# Altium PCB panel.PcbDoc (part 2 of 3)
Units mm, origin at the board's own origin, x right, y up, seen from the top; angles counter-clockwise.
Board outline 152.4 x 101.6 mm, 2 copper layers (Top Layer, Bottom Layer); 276 components, 0 nets, 996 pads, 236 vias.
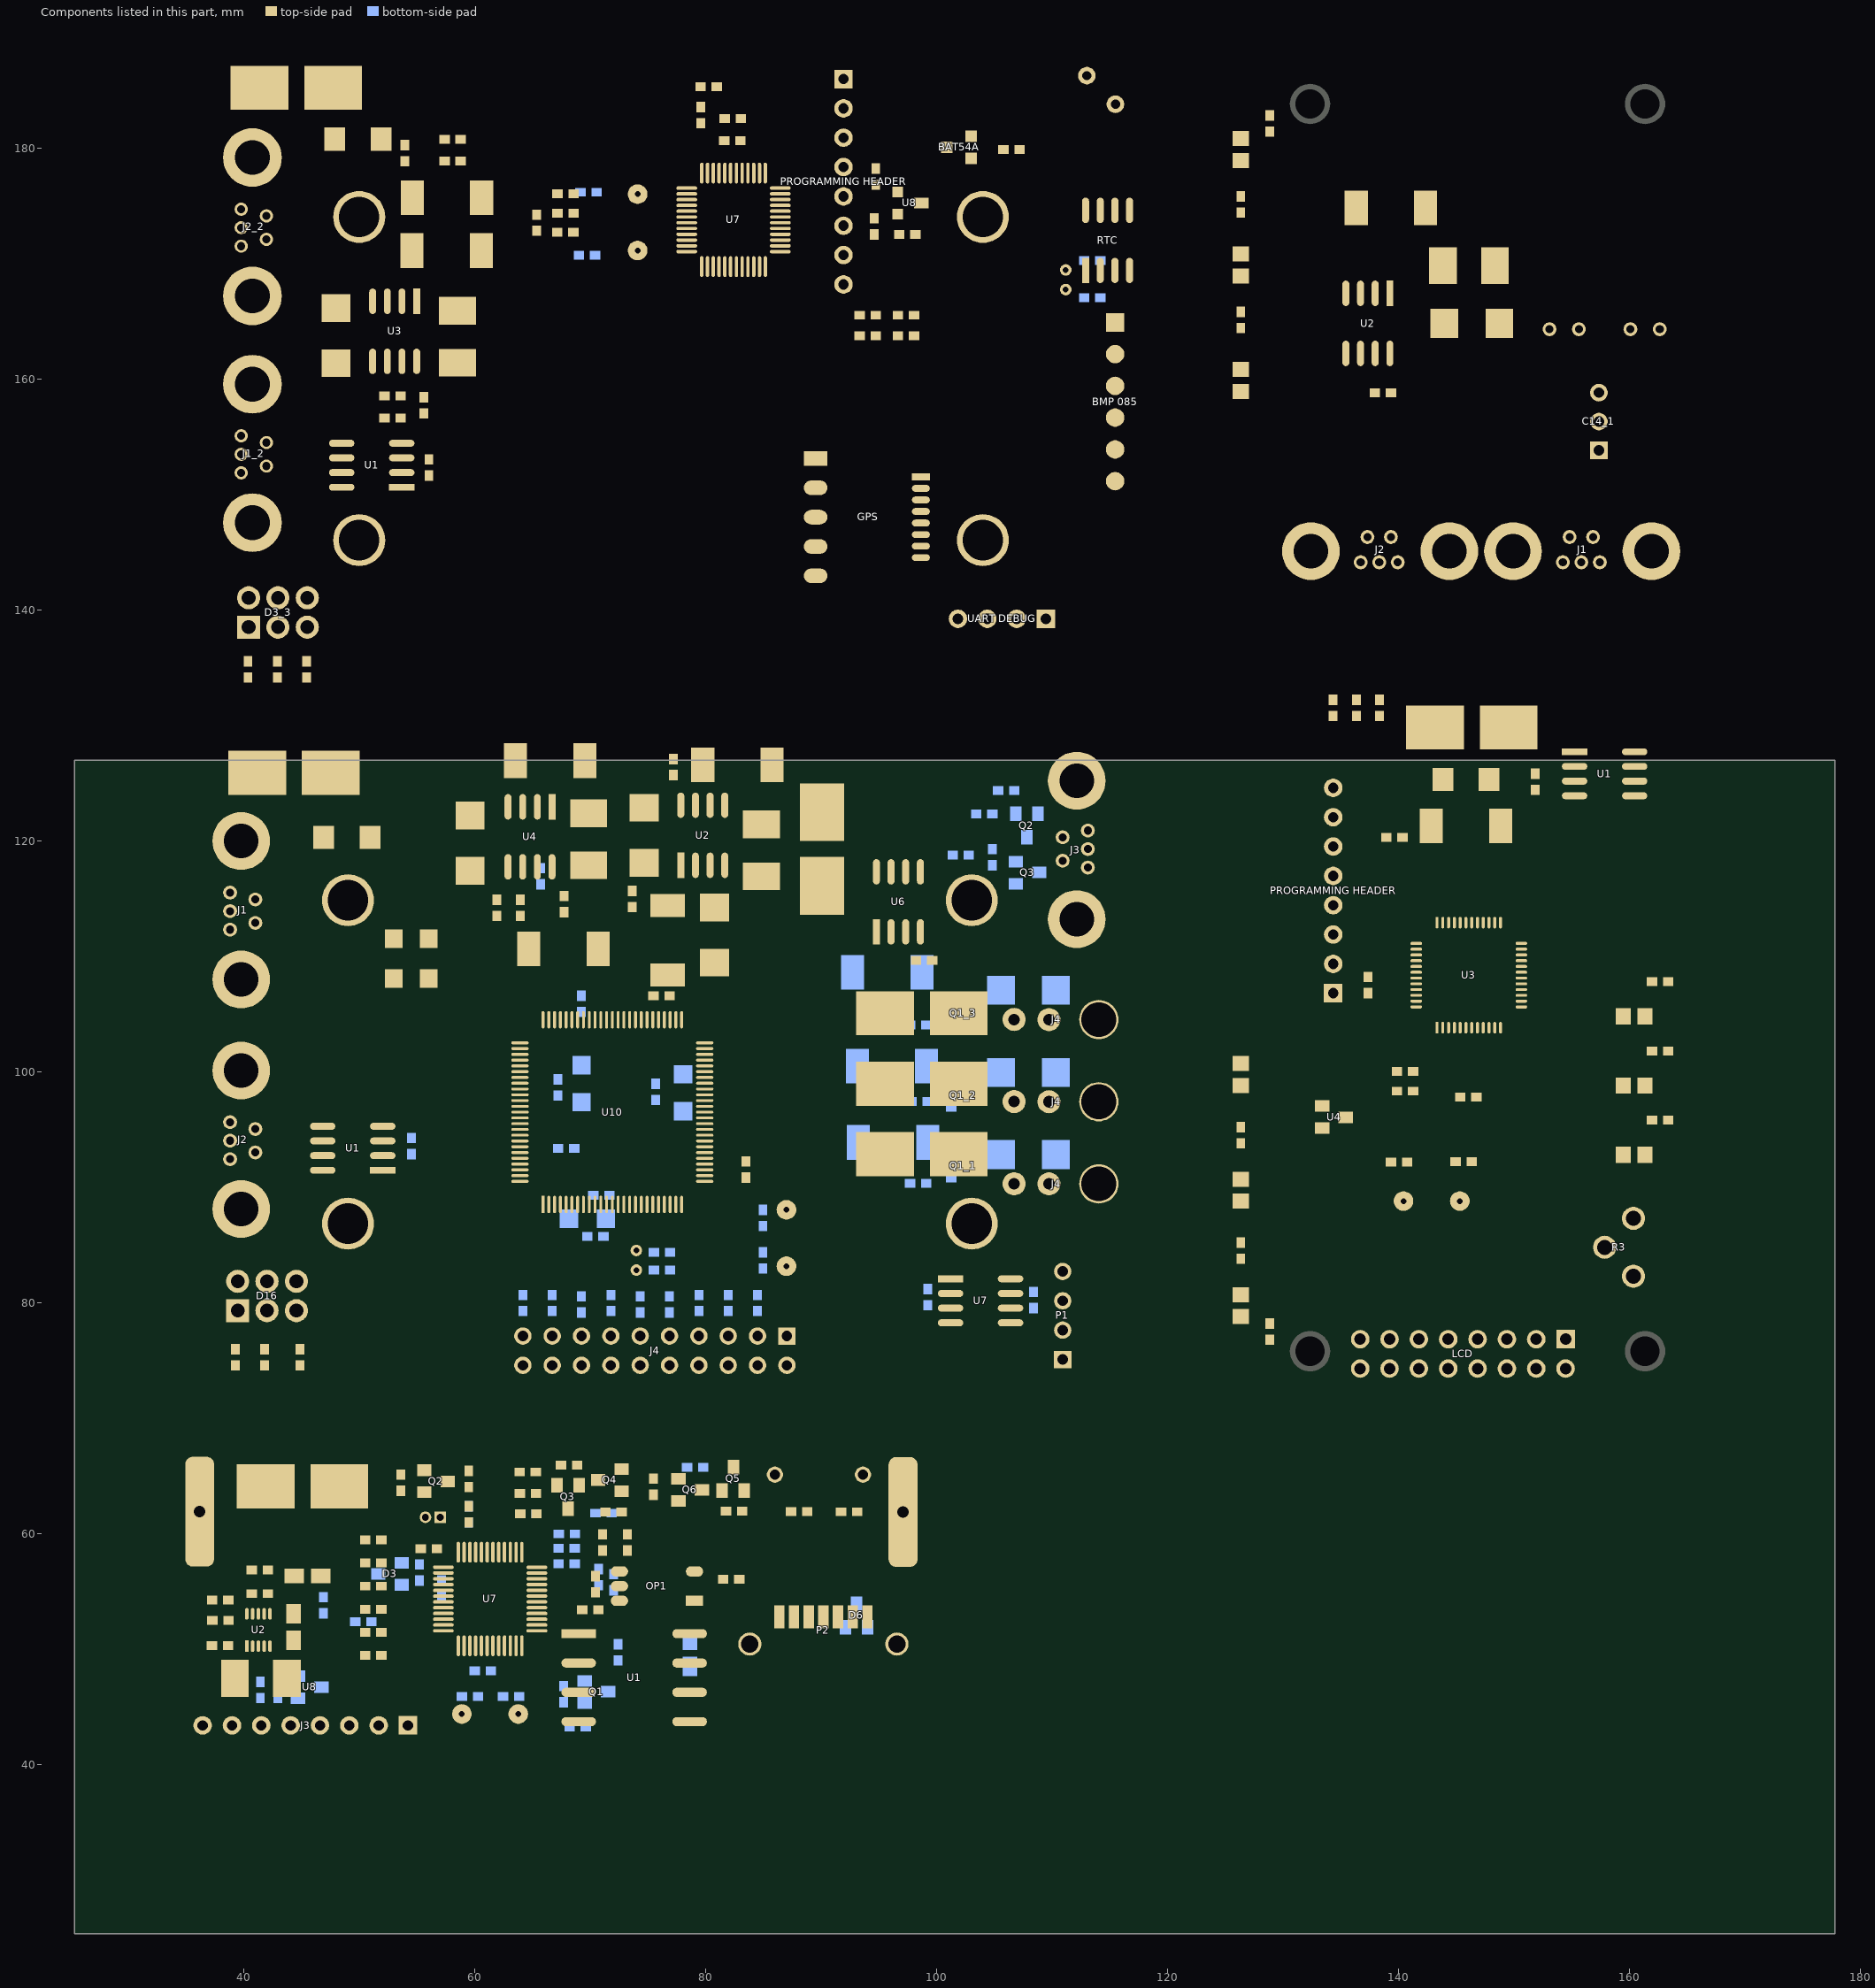
[diagram p2: the components of this part, seen from the top]

## Via types
v1: diameter 0.8, hole 0.4, Top Layer to Bottom Layer, 133 vias
v2: diameter 0.4, hole 0.2, Top Layer to Bottom Layer, tented both sides, 32 vias
v3: diameter 0.8, hole 0.4, Top Layer to Bottom Layer, tented both sides, 30 vias
v4: diameter 0.6, hole 0.3, Top Layer to Bottom Layer, tented both sides, 15 vias
v5: diameter 1.27, hole 1, Top Layer to Bottom Layer, 6 vias
v6: diameter 0.4, hole 0.2, Top Layer to Bottom Layer, 4 vias
v7: diameter 2, hole 1, Top Layer to Bottom Layer, 4 vias
v8: diameter 1, hole 0.4, Top Layer to Bottom Layer, 3 vias
v9: diameter 0.8, hole 0.4, Top Layer to Bottom Layer, tented top, 2 vias
v10: diameter 1.27, hole 0.711, Top Layer to Bottom Layer, 2 vias
v11: diameter 1, hole 0.6, Top Layer to Bottom Layer, tented both sides, 2 vias
v12: diameter 0.6, hole 0.3, Top Layer to Bottom Layer, 2 vias
v13: diameter 0.8, hole 0.4, Top Layer to Bottom Layer, tented bottom, 1 vias

## Nets (pads, with @x,y where several pads share a name; then routed paths per layer and width w, separated by ;. In a path a pad name is that pad's centre, name@x,y a point inside that pad or via, vN(x,y) a via of type N, cw(c..) or ccw(c..) an arc to the next point about the centre after c; other vN are vias at no path point) (continued)
copper on no net: | length 5575.7
  Top Layer w0.2: 111.198,167.756 113.898,167.756 114.184,168.042 114.184,169.415 ; 111.198,169.456 112.873,169.456 ; 126.352,80.728 126.502,80.578 127.352,80.578 ; 126.352,90.728 127.352,89.728 ; 126.352,100.728 127.352,99.728 127.352,89.728 ; 126.352,158.928 128.052,157.228 128.052,133.378 v1(134.177,127.253) ; 126.352,168.928 127.352,167.928 ; 126.352,178.928 127.352,177.928 127.352,167.928 ; 127.352,157.928 127.352,167.928 ; v1(133.352,85.578) 128.352,80.578 127.352,80.578 ; 133.402,97.053 134.727,98.378 135.227,98.378 ; 134.352,109.368 134.352,109.828 134.665,110.141 141.542,110.141 ; 134.352,111.908 134.352,112.328 136.852,114.828 145.852,114.828 146.842,113.838 146.842,112.941 ; 134.352,114.448 135.222,115.318 146.362,115.318 147.342,114.338 147.342,112.941 ; 134.352,119.528 133.612,118.788 133.606,118.788 132.552,117.734 132.552,117.728 132.377,117.553 132.377,101.228 135.227,98.378 ; v1(136.352,112.328) 136.352,111.828 137.552,110.628 141.529,110.628 141.542,110.641 ; 136.736,144.144 135.852,145.027 135.852,146.328 137.852,148.328 154.352,148.328 155.852,146.828 155.852,145.76 154.236,144.144 154.236,133.288 158.802,128.721 158.802,126.928 159.267,126.463 160.452,126.463 ; 137.32,146.328 138.901,147.909 153.239,147.909 154.82,146.328 154.82,146.001 153.336,144.516 153.336,133.622 158.402,128.556 158.402,125.828 159.037,125.193 160.452,125.193 ; 137.352,106.828 139.352,106.828 140.165,107.641 141.542,107.641 ; 137.352,108.225 137.352,108.828 137.665,109.141 141.542,109.141 ; v1(137.852,104.828) 140.352,102.328 142.883,102.328 143.772,103.216 143.772,103.771 143.842,103.841 ; v1(137.852,116.328) 138.352,115.828 146.852,115.828 148.342,114.338 148.342,112.941 ; v1(138.352,111.328) 138.352,112.828 139.852,114.328 142.852,114.328 143.342,113.838 143.342,112.941 ; v1(138.665,108.141) 141.542,108.141 ; 139.352,92.203 139.352,90.603 140.437,89.518 140.437,88.828 139.937,88.328 ; v1(139.852,111.328) 140.039,111.141 141.542,111.141 ; v1(141.352,103.328) 141.865,103.841 143.342,103.841 143.365,103.841 ; 144.342,103.841 144.342,102.818 139.902,98.378 135.227,98.378 ; 144.842,103.841 144.842,104.319 147.442,106.919 147.442,110.418 150.102,113.078 v1(152.102,113.078) ; 145.342,103.841 145.342,102.818 144.352,101.828 144.352,98.828 145.352,97.828 ; v1(145.352,100.828) 145.842,101.318 145.842,103.841 ; 145.817,88.328 145.317,88.828 145.317,89.618 146.352,90.653 146.352,92.228 ; 146.342,103.841 146.342,99.838 v1(146.352,99.828) ; 146.749,97.828 147.352,98.431 147.352,101.828 146.842,102.338 146.842,103.841 ; 147.342,103.841 147.342,102.404 147.752,101.994 147.752,94.928 v1(148.352,94.328) ; 147.842,103.841 147.842,109.818 149.852,111.828 v1(152.102,111.828) ; 148.342,103.841 148.342,97.838 v1(148.852,97.328) ; v1(149.852,99.328) 149.352,99.828 149.352,104.762 148.852,105.262 148.852,108.828 149.665,109.641 150.642,109.641 ; v1(150.352,100.828) 150.852,100.828 153.352,103.328 153.352,107.828 152.852,108.328 151.852,108.328 151.665,108.141 150.642,108.141 ; 150.642,105.641 151.852,104.43 v1(151.852,103.328) ; 150.642,107.641 152.289,107.641 v1(152.352,107.578) ; 150.642,108.641 151.48,108.641 155.252,112.412 155.252,123.923 ; 150.642,109.141 151.415,109.141 153.352,111.078 153.352,123.672 154.203,124.523 156.231,124.523 156.652,124.944 156.652,127.528 156.447,127.733 155.252,127.733 ; v1(157.102,98.828) 159.452,98.828 ; v1(157.102,104.828) 159.452,104.828 ; 127.352,80.578 127.352,89.728
  Top Layer w0.25: 42.937,134.169 43.95,133.156 47.834,133.156 75.848,161.17 v1(75.848,167.306) v1@75.998,167.456 ; 45.477,134.169 48.211,134.169 75.098,161.056 75.098,165.956 v1(74.498,166.556) ; 53.711,150.641 60.883,150.641 v1(74.198,163.956) ; v1@76.538,171.496 v1(76.498,171.456) 76.585,171.543 78.384,171.543 ; v1(78.198,170.156) 78.335,170.293 78.335,171.021 ; 80.66,168.794 80.273,168.407 80.273,166.044 81.611,164.707 91.798,164.707 92.745,163.76 93.356,163.76 ; 81.184,169.743 81.184,168.682 80.723,168.221 80.723,166.231 81.797,165.157 92.975,165.157 93.356,165.538 ; v1(81.798,167.756) 81.798,168.156 82.184,168.542 82.184,169.743 ; v1(83.098,165.956) 83.173,166.031 83.173,169.732 83.184,169.743 ; 83.684,169.743 83.684,166.97 v1(84.598,166.056) ; v1(84.798,163.751) 91.8,163.751 95.882,159.669 v5@115.476,159.669 ; v1(86.298,162.456) 86.298,160.356 89.989,156.665 v5(115.476,156.665)
  Top Layer w0.254: 37.292,54.271 37.312,54.251 37.312,52.511 ; 38.689,54.271 40.151,54.271 40.719,54.839 ; 38.709,52.511 39.158,52.96 40.171,52.96 40.298,53.087 ; 38.812,50.287 40.298,50.287 ; 38.848,92.459 38.988,92.459 39.875,91.572 43.2,91.572 44.396,92.768 46.864,92.768 ; 39.266,47.499 39.43,47.499 ; 39.304,74.607 40.751,73.16 46.726,73.16 49.115,75.549 49.115,79.537 62.564,92.986 63.898,92.986 63.944,93.032 ; 39.304,76.004 39.304,79.142 39.507,79.345 ; 40.536,57.151 40.536,55.119 40.798,54.857 40.798,53.087 ; 40.798,50.287 v2(40.798,51.567) ; 41.032,112.918 41.381,112.918 ; 41.298,53.087 41.298,52.145 v2(41.312,52.131) ; 41.547,43.382 42.625,42.304 56.025,42.304 56.852,43.131 56.852,45.691 59.609,48.448 59.609,50.323 ; 41.844,74.607 42.789,73.662 46.257,73.662 48.459,75.864 48.459,79.523 62.468,93.532 63.944,93.532 ; 41.844,76.004 41.844,79.142 42.047,79.345 ; 41.933,57.151 42.882,57.151 43.087,56.946 v2(43.087,56.931) ; 42.2,55.119 41.933,55.119 42.775,55.119 42.937,55.281 v2(42.937,55.606) ; 43.501,94.038 46.864,94.038 ; 43.832,50.287 44.346,50.801 ; v2(44.115,54.334) 44.346,54.103 44.37,53.111 ; 44.346,53.087 44.37,53.111 ; 44.371,53.088 44.37,53.111 ; 44.587,79.345 44.892,79.04 44.892,76.004 ; 44.59,53.331 44.37,53.111 ; 44.892,74.607 45.623,74.607 46.04,75.024 v9(46.078,75.024) ; v1(45.203,120.278) v1@45.252,120.327 ; 46.285,120.998 46.956,120.327 ; 49.707,43.622 49.782,43.622 ; v2(50.092,47.511) v2@50.132,47.511 ; 51.601,43.622 49.332,45.891 49.332,54.071 49.752,54.491 53.049,54.491 54.681,56.123 57.309,56.123 ; 51.952,49.491 53.639,47.804 57.515,47.804 59.109,49.398 59.109,50.323 ; 51.952,51.491 52.972,51.491 54.452,50.011 v2(57.712,50.011) ; 51.952,53.491 52.099,53.344 54.539,53.344 v2(54.552,53.331) ; 51.952,55.491 53.407,55.491 54.539,56.623 57.309,56.623 ; 51.952,57.491 52.072,57.611 57.612,57.611 v2(57.832,57.831) ; 51.952,59.491 v2(53.852,59.491) ; 52.064,91.498 55.99,91.498 60.206,95.714 60.206,98.127 62.611,100.532 63.944,100.532 ; 52.064,92.768 v3(53.689,92.768) ; 52.064,95.308 56.382,95.308 62.285,101.211 62.285,102.744 62.71,103.169 64.912,103.169 65.219,102.862 65.219,100.213 65.024,100.018 63.958,100.018 63.944,100.032 ; 53.012,112.112 53.012,111.533 53.012,112.262 ; v2@53.173,53.973 54.838,55.638 57.294,55.638 57.309,55.623 ; v2(53.192,52.631) 54.932,52.631 55.432,53.131 57.301,53.131 57.309,53.123 ; 53.633,63.746 53.76,63.619 55.665,63.619 v2(56.443,62.841) ; v6(55.092,51.711) 55.092,52.051 55.664,52.623 57.309,52.623 ; 55.352,58.711 55.352,58.736 52.549,61.539 52.549,64.467 53.225,65.143 53.633,65.143 55.284,65.143 55.665,65.524 ; v6(55.812,51.711) 55.812,51.991 55.944,52.123 57.309,52.123 ; 56.06,111.533 56.514,111.533 v1(57.429,110.618) ; 56.749,58.711 58.321,58.711 58.609,58.423 58.598,58.411 ; 57.032,61.451 57.989,62.408 59.512,62.408 59.512,64.074 ; 57.697,64.559 58.609,65.471 59.512,65.471 ; v2(58.572,61.011) 59.512,61.011 60.109,60.414 60.109,58.423 ; v2(58.609,56.291) 58.792,56.291 59.609,57.108 59.609,58.423 ; 58.916,44.415 61.119,46.618 61.119,50.313 61.109,50.323 ; v2(59.592,52.411) 59.982,52.801 59.982,55.243 62.109,57.37 62.109,58.423 ; v4(60.452,48.931) 60.492,48.931 60.609,49.048 60.609,50.323 ; 60.609,58.423 60.609,60.488 61.872,61.751 63.972,61.751 v2(63.972,60.811) ; v2(60.652,53.131) 60.652,55.271 62.586,57.205 62.586,58.4 62.609,58.423 ; v1(61.168,97.007) 61.168,96.044 63.18,94.032 63.944,94.032 ; v2(61.312,54.751) 62.772,54.751 63.582,55.561 63.582,57.471 63.586,57.475 63.586,58.4 63.609,58.423 ; 61.609,50.323 61.609,46.602 63.796,44.415 ; 61.929,113.527 63.961,113.527 65.45,113.527 ; 61.929,114.924 63.961,114.924 63.961,115.015 64.181,115.235 64.181,117.768 ; 62.109,50.323 62.132,50.3 62.132,49.375 62.132,48.551 v4(62.352,48.331) ; v1(62.282,90.567) 62.282,91.312 62.954,91.984 63.896,91.984 63.944,92.032 ; v1(62.359,98.292) 63.099,99.032 63.944,99.032 ; 62.577,117.434 62.911,117.768 ; 62.911,122.89 62.982,122.961 ; 62.911,126.318 63.556,126.963 63.391,127.128 ; v2(63.535,51.646) 65.386,51.646 65.409,51.623 ; 63.813,63.642 63.94,63.515 ; 63.915,65.371 63.94,65.346 63.94,63.515 ; 63.944,90.532 63.944,85.44 70.411,78.973 70.411,76.64 71.276,75.775 72.984,75.775 74.356,77.147 ; 63.944,92.532 64.995,92.532 v1(65.625,93.162) 67.578,93.162 70.687,90.054 ; 63.944,94.532 65.907,94.532 66.297,94.142 68.157,94.142 69.431,95.416 v1(69.431,95.466) ; 63.944,95.032 67.425,95.032 v1(67.497,95.104) ; 63.956,98.52 v1(65.625,98.52) ; v2(63.992,52.291) 64.16,52.123 65.409,52.123 65.386,52.146 ; v2(64.109,56.431) 64.109,54.345 64.332,54.123 65.409,54.123 ; v1(64.842,82.923) 69.276,78.489 69.276,77.147 ; 65.245,117.562 65.451,117.768 ; 65.337,63.515 66.657,62.195 68.096,62.195 ; 65.369,61.751 63.94,63.18 63.94,63.515 ; 65.409,52.623 65.428,52.604 ; 65.409,54.623 66.56,54.623 66.751,54.432 66.751,49.272 67.152,48.871 68.992,48.871 69.032,48.831 ; 65.409,55.123 66.78,55.123 67.205,54.698 67.205,50.058 67.552,49.711 70.472,49.711 70.892,49.291 70.892,46.451 70.692,46.251 69.072,46.251 69.032,46.291 ; 65.409,55.623 65.432,55.6 67.083,55.6 v2(67.112,55.571) ; 65.409,56.123 67.024,56.123 67.972,57.071 67.972,59.218 69.805,61.051 74.512,61.051 75.492,62.031 75.492,63.391 ; 65.409,56.623 66.524,56.623 67.518,57.617 67.518,59.477 69.932,61.891 71.352,61.891 ; 65.498,113.85 67.752,113.85 ; v2(65.792,47.411) v2(65.792,51.011) ; 65.944,88.532 65.944,84.448 71.816,78.576 71.816,77.147 ; v1(66.052,106.318) 66.547,106.318 67.444,105.421 67.444,104.532 ; 66.49,88.486 66.444,88.532 66.444,84.595 70.978,80.061 79.062,80.061 81.976,77.147 ; 66.721,117.768 66.721,116.278 67.752,115.247 ; 66.944,88.532 66.944,84.787 71.216,80.515 80.306,80.515 83.278,77.543 83.278,76.376 82.677,75.775 80.808,75.775 79.436,77.147 ; 67.156,64.227 67.156,64.687 67.156,65.635 67.492,65.971 ; v1(67.271,92.089) 67.271,92.221 69.944,89.548 69.944,88.532 ; 67.444,88.532 67.444,84.93 71.257,81.117 80.546,81.117 84.516,77.147 ; 67.929,104.547 v1(67.929,106.983) ; 67.992,88.484 67.944,88.532 67.944,85.726 69.38,84.29 v13(69.444,84.29) ; v4(68.652,56.091) 68.912,56.351 69.892,57.331 71.986,57.331 72.556,56.761 72.556,57.587 v4(72.552,57.591) ; 68.889,65.971 69.061,65.799 69.061,64.227 70.255,64.227 70.712,64.684 ; 69.328,122.968 69.896,122.4 ; 69.335,53.451 69.335,53.797 70.492,54.954 ; v1(69.423,86.754) v1@69.465,86.796 ; 69.556,122.74 69.896,122.4 ; v4(69.712,55.491) 69.955,55.491 70.492,54.954 ; v1(69.896,120.64) 69.896,122.4 ; 70.409,90.323 70.409,88.567 70.444,88.532 70.43,88.518 ; 70.492,56.351 71.352,55.491 72.556,55.491 ; 70.704,110.675 71.988,110.675 v1(71.991,110.672) ; v1(70.813,106.396) v1@70.864,106.447 ; v12(71.021,90.389) 70.687,90.054 ; 71.042,122.4 69.896,122.4 ; v1(71.229,91.664) 72.861,91.664 73.944,90.581 73.944,88.532 ; 71.444,88.532 71.444,89.296 70.687,90.054 ; v1(71.662,86.242) 72.944,87.524 72.944,88.532 72.944,90.086 72.641,90.389 v12(72.227,90.389) ; 71.944,104.532 71.944,96.105 78.763,89.286 87.731,89.286 97.457,79.56 101.22,79.56 ; v4(72.052,62.731) 72.032,62.711 72.032,62.608 72.749,61.891 72.749,63.714 72.744,63.719 ; v1(72.106,115.052) 72.877,114.281 73.678,114.281 ; v4(72.272,60.091) 73.109,60.091 73.232,59.968 ; 72.444,104.532 72.444,96.513 79.206,89.751 88.478,89.751 97.355,80.874 101.176,80.874 101.22,80.83 ; 72.556,54.221 71.682,54.221 71.189,54.714 70.732,54.714 70.492,54.954 ; 73.444,88.532 73.444,85.767 73.194,85.517 73.194,83.68 74.021,82.853 ; 73.678,115.678 73.678,117.588 74.694,118.604 ; 74.021,84.553 75.059,84.553 75.451,84.945 75.451,85.677 74.444,86.684 74.444,88.532 ; v1(74.228,106.447) 74.64,106.447 74.869,106.218 75.106,106.218 75.499,106.611 75.499,105.987 75.944,105.542 75.944,104.532 ; 75.492,64.788 77.648,64.788 77.66,64.776 77.66,65.303 77.252,65.711 v4(77.252,66.291) ; v1(75.545,102.737) 76.444,103.636 76.444,104.532 76.444,105.454 76.928,105.938 76.928,106.579 76.896,106.611 ; 76.444,88.532 76.444,86.539 77.251,85.732 84.479,85.732 87.017,83.194 ; 76.726,108.408 78.779,108.408 v1(78.886,108.301) ; 76.726,114.408 77.091,114.408 ; 76.896,77.147 76.896,77.632 ; 76.944,88.532 76.944,86.681 77.439,86.186 85.129,86.186 87.017,88.074 ; 77.208,125.685 77.208,123.765 77.869,123.104 ; 77.234,127.108 79.266,127.108 79.774,126.6 ; v3(79.032,55.811) v3@79.056,55.835 ; v1(79.117,109.534) 79.168,109.483 80.79,109.483 ; 79.139,122.128 79.139,123.104 ; 79.692,63.811 81.415,63.811 81.455,63.771 81.455,62.323 82.039,61.739 ; 79.835,126.6 79.774,126.6 ; 79.944,93.532 79.992,93.58 90.234,93.58 v1(90.264,93.55) ; 79.944,94.532 88.078,94.532 90.364,96.818 v1(90.414,96.818) ; 79.944,95.032 83.72,95.032 90.616,101.928 90.616,101.976 v1(90.565,102.027) ; 79.944,98.032 81.282,98.032 81.849,97.465 v1(81.856,97.465) ; 79.944,100.532 85.058,100.532 95.446,110.92 95.446,113.443 95.847,113.844 98.317,113.844 98.613,113.548 98.613,112.139 ; 79.944,101.032 84.802,101.032 94.803,111.033 94.803,112.139 ; v1(79.981,119.744) 80.409,119.316 80.409,117.904 ; 80.409,125.965 79.774,126.6 ; 80.666,127.431 81.101,127.431 v1(81.132,127.4) ; v1(81.605,92.217) v1@81.724,92.336 ; 81.679,117.904 81.679,118.273 ; 81.679,123.104 81.734,123.104 v1(82.749,124.119) ; 82.93,56.074 82.947,56.091 82.972,56.116 ; 83.36,63.771 83.42,63.711 ; 83.436,61.739 83.436,63.695 ; 83.982,116.076 84.854,116.948 ; 84.854,121.448 85.774,122.368 ; 89.056,121.448 90.104,122.496 ; 93.638,65.143 93.792,64.989 ; 94.022,52.831 94.032,52.841 ; 96.073,112.139 96.073,110.31 96.131,110.252 v1(96.207,110.252) ; v1(96.624,120.829) 96.861,121.066 101.168,121.066 v1(102.461,122.359) v1@102.208,122.359 ; 99.629,109.659 100.802,109.659 v1(100.806,109.663) ; 100.888,78.05 101.128,78.29 101.22,78.29 ; 106.42,78.29 107.757,78.29 110.932,75.115 ; 106.42,79.56 109.027,79.56 110.932,77.655 ; 106.42,80.83 110.297,80.83 110.932,80.195 ; 106.42,82.1 109.051,82.1 109.686,82.735 110.932,82.735 ; 110.651,120.327 110.932,120.327 ; 112.694,121.334 113.116,120.911
  Top Layer w0.3: 37.272,50.331 37.272,51.331 v2(37.292,51.351) ; 38.848,92.459 40.382,93.993 41.609,93.993 42.745,95.129 42.745,109.381 39.792,112.334 38.848,112.334 ; 39.43,47.499 41.298,49.367 41.298,50.287 ; 39.814,171.515 40.939,171.515 44.198,168.256 44.198,158.009 40.898,154.709 40.898,152.974 39.814,151.89 40.847,150.856 43.398,150.856 44.453,151.911 48.511,151.911 ; 41.032,93.043 42.506,93.043 43.501,94.038 43.501,110.798 41.381,112.918 ; 41.798,50.287 41.798,49.467 43.766,47.499 ; 41.798,53.087 41.798,53.644 42.121,53.967 42.668,53.967 42.934,54.233 ; 41.998,152.474 44.969,155.445 ; 41.998,172.099 44.969,169.128 44.969,155.445 ; 42.993,135.622 42.993,138.526 ; 44.346,53.087 44.371,53.087 44.408,53.087 ; 45.477,135.566 45.477,138.47 45.533,138.526 ; v4(46.092,55.331) 46.688,55.927 46.688,56.363 ; v2(47.912,46.811) 48.532,47.431 v3(48.532,54.511) ; 48.511,153.181 47.233,153.181 44.969,155.445 ; v2(49.312,59.491) 50.555,59.491 50.555,57.491 50.555,55.491 ; v2@50.132,47.511 54.021,43.622 54.787,43.622 ; v2(50.552,48.351) 50.555,48.354 50.555,49.491 50.555,51.491 50.555,53.491 ; 53.012,112.262 56.133,115.383 ; 53.711,151.911 55.81,151.911 56.064,151.657 ; 53.711,154.451 62.993,154.451 v9(71.598,163.056) ; v3(54.104,103.904) 54.104,107.012 53.012,108.104 56.06,108.104 ; v3(54.739,54.511) 54.852,54.511 55.74,53.623 57.309,53.623 ; v4(55.812,55.011) 55.812,55.095 55.84,55.123 57.309,55.123 ; 58.812,180.778 58.812,178.873 63.215,178.873 71.798,187.456 v1(87.998,187.456) ; 61.109,58.423 61.109,59.568 61.532,59.991 v4(65.632,59.991) ; 62.109,50.323 62.109,51.668 v3@62.132,51.691 ; 64.109,58.423 64.624,58.423 65.112,58.911 v4(65.632,58.911) ; v2(65.292,66.071) 65.312,66.051 65.312,65.371 ; 65.525,174.114 65.398,174.241 ; v4(66.452,65.391) 67.156,64.687 ; 68.595,176.056 68.573,176.034 68.573,172.717 73.837,172.717 74.048,172.506 76.148,172.506 76.685,173.043 78.384,173.043 ; v1(69.423,86.754) 69.959,86.754 70.43,87.225 70.43,88.518 ; v4(69.752,60.111) 70.969,60.111 71.112,59.968 ; 70.944,88.532 70.944,86.96 v1(71.662,86.242) ; 72.744,65.624 73.705,65.624 v2(73.712,65.631) ; 74.13,176.02 76.107,174.043 78.384,174.043 ; v1(75.298,173.256) 75.585,173.543 78.384,173.543 ; v1(76.698,175.356) 76.885,175.543 78.384,175.543 ; v2(77.66,61.951) 77.66,62.871 ; v1(78.018,98.532) 79.944,98.532 83.941,98.532 94.542,109.133 96.284,109.133 97.343,110.192 ; 78.384,174.543 v1@80.77,174.543 ; 78.384,176.543 77.211,176.543 75.198,178.556 66.898,178.556 63.998,175.656 63.998,171.37 66.112,169.256 76.656,169.256 77.798,168.114 77.798,166.956 v1(87.998,156.756) ; 78.632,46.291 80.572,46.291 81.352,47.071 81.352,50.231 83.192,52.071 84.492,52.071 85.672,50.891 87.677,50.891 88.942,52.156 88.942,52.831 ; 78.632,48.831 80.452,48.831 80.692,49.071 80.692,50.451 82.892,52.651 84.619,52.651 85.789,51.481 86.997,51.481 87.672,52.156 87.672,52.831 ; 78.848,91.532 79.944,91.532 79.969,91.507 80.766,91.507 81.381,90.892 ; 79.706,182.038 79.591,182.153 80.295,182.153 80.661,182.519 81.635,182.519 ; 79.944,93.032 81.605,93.032 ; 80.184,177.843 80.184,178.87 79.883,179.171 66.664,179.171 63.398,175.905 63.398,171.263 66.005,168.656 76.407,168.656 77.198,167.865 77.198,161.256 86.144,152.31 88.072,152.31 88.706,151.676 90.387,151.676 91.298,150.765 91.298,149.802 89.547,148.051 ; 80.684,177.843 80.684,179.219 80.132,179.771 66.416,179.771 62.798,176.153 62.798,171.156 65.898,168.056 76.159,168.056 76.598,167.617 76.598,161.149 85.937,151.81 87.724,151.81 88.457,151.076 89.062,151.076 89.547,150.591 88.172,149.216 88.172,147.482 88.798,146.856 90.698,146.856 92.383,148.541 98.657,148.541 99.696,148.541 100.098,148.14 100.098,145.156 104.405,140.849 104.405,139.249 ; v1@80.988,184.056 80.988,185.328 ; v1(81.605,92.217) 81.605,93.032 ; 81.672,182.556 81.635,182.519 ; 81.684,177.843 81.684,180.602 81.635,180.651 81.635,182.519 ; v1(81.898,166.456) 82.684,167.242 82.684,169.743 ; 83.032,180.651 v3@84.293,180.651 ; 83.069,182.556 v3(84.498,182.556) ; v1@83.184,175.942 83.184,177.843 ; 83.5,92.26 82.728,93.032 81.605,93.032 ; 84.184,177.843 84.184,178.827 88.802,183.445 91.959,183.445 ; 85.897,64.916 85.897,63.195 87.167,61.925 ; 86.484,172.543 88.753,172.543 89.448,173.238 89.448,175.854 91.959,178.365 ; 86.484,173.043 88.546,173.043 88.948,173.445 88.948,177.894 91.959,180.905 ; 86.484,173.543 87.585,173.543 v6(87.998,173.956) ; v1(87.672,150.456) 86.948,149.732 86.948,145.201 87.793,144.356 95.172,144.356 96.357,145.541 98.657,145.541 ; 89.067,61.925 91.739,61.925 ; v3(90.398,172.356) 91.03,172.356 91.959,173.285 92.594,173.92 94.626,173.92 94.398,174.148 94.398,176.841 96.023,176.841 96.658,176.206 ; 91.372,150.691 95.863,150.691 96.998,149.556 98.657,149.556 ; 91.508,168.656 91.959,168.205 ; 93.136,61.925 93.792,62.581 93.792,64.989 ; v3(94.626,170.872) 94.626,172.523 ; 94.753,163.76 96.658,163.76 v1(96.658,162.196) 105.258,162.196 v1(105.298,162.156) ; 94.753,165.538 96.658,165.538 96.658,166.796 v1(96.598,166.856) ; v1(95.398,175.356) 96.453,174.301 96.658,174.301 ; 96.073,117.339 96.073,118.814 97.817,120.558 109.031,120.558 110.242,121.769 112.259,121.769 113.116,120.911 ; v3(96.785,170.943) 96.785,172.523 96.785,174.174 ; v1(96.898,160.956) 103.698,160.956 v1(103.798,161.056) ; 97.343,112.139 97.343,110.192 ; 97.343,117.847 97.343,118.923 98.259,119.839 110.163,119.839 110.651,120.327 ; 98.232,109.659 97.876,109.659 97.343,110.192 ; 103.008,179.132 103.008,181.032 ; 103.108,180.056 105.635,180.056 105.802,179.889 ; 107.199,179.889 111.587,179.889 115.5,183.802 117.698,181.604 117.698,173.544 115.454,171.3 115.454,169.415 ; v3@113.898,154.056 114.039,153.915 v5(115.476,153.915) ; 113.998,151.256 114.089,151.165 v5(115.476,151.165) ; v1@115.398,176.456 115.442,176.5 v1(115.454,176.5) 115.454,174.615 ; 116.724,174.615 v1@116.724,176.43 ; 65.398,174.241 65.513,174.356 67.198,174.356 67.198,176.056 65.798,176.056 v1(65.398,175.656) 65.398,174.241
  Top Layer w0.4: 39.507,81.885 42.047,81.885 44.587,81.885 48.994,81.885 52.368,85.259 52.368,88.567 49.824,91.111 49.824,95.787 61.39,107.353 67.559,107.353 v1(67.929,106.983) ; 42.392,50.287 v4(42.99,50.287) 43.832,50.287 ; 42.512,53.087 44.346,53.087 ; 42.934,54.233 42.952,54.233 44.371,55.652 44.371,56.332 44.402,56.363 44.402,57.401 ; 48.309,62.508 48.309,64.127 ; 49.848,94.038 52.064,94.038 53.65,94.038 v1(53.654,94.034) ; 69.032,43.751 71.132,43.751 v3(71.252,43.871) ; 69.032,51.371 72.192,51.371 v3@73.912,53.091 ; 70.732,53.451 70.812,53.371 71.552,53.371 71.832,53.091 v3@73.912,53.091 ; 71.112,58.571 73.232,58.571 73.332,58.571 73.952,57.951 v3(73.952,53.131) v3@73.912,53.091 ; v1(75.545,102.737) 75.545,101.005 v1(78.018,98.532) 78.018,92.362 78.848,91.532 ; v3(78.632,42.891) 78.632,43.751 ; 79.68,54.221 79.056,54.221 79.392,54.221 81.245,56.074 81.533,56.074 ; 81.381,90.892 92.428,90.892 97.093,86.227 ; 82.947,56.091 v3(91.572,56.091) 92.752,54.911 92.752,52.831 ; v3(86.352,54.571) 86.352,52.881 86.402,52.831 ; 90.212,52.831 v3(90.212,54.691) ; 94.022,52.831 v3(95.172,52.831) ; v1(96.165,85.299) 97.093,86.227 ; v1(100.888,77.133) 100.888,78.05 ; 101.22,82.1 97.093,86.227
  Top Layer w0.5: v1(38.498,133.956) 40.184,133.956 40.397,134.169 ; 39.692,153.456 39.814,153.334 39.814,153.49 ; 40.453,135.622 40.453,138.526 ; 44.402,56.363 44.402,58.221 48.309,62.128 48.309,64.127 ; 44.408,53.087 45.832,54.511 v3(48.532,54.511) ; v1@45.252,120.327 46.956,120.327 ; v1@47.998,164.256 48.017,164.275 48.017,166.145 ; 51.192,166.741 51.192,168.15 v3(51.698,168.656) ; 53.998,180.282 53.986,180.27 55.19,180.27 v1(55.698,180.778) 57.415,180.778 ; 55.002,161.541 55.002,160.191 55.637,159.556 55.637,158.426 ; 56.064,151.657 56.065,151.656 v3(57.598,151.656) ; v3(58.912,54.911) 58.912,52.172 59.393,51.691 v3(62.109,51.691) ; 59.624,117.434 62.577,117.434 ; 59.624,122.204 59.723,122.303 v1(59.723,124.043) ; 60.563,175.756 60.621,175.698 60.84,175.698 ; v1(61.867,127.128) 63.391,127.128 ; 62.911,117.768 62.911,119.156 63.529,119.774 68.022,119.774 69.896,117.9 ; 62.911,122.968 62.911,126.318 ; 66.721,122.968 69.328,122.968 ; 69.556,122.74 69.556,126.963 ; v1@70.864,106.447 v1(74.228,106.447) ; 74.694,118.604 77.169,118.604 77.869,117.904 ; 74.694,122.404 75.789,121.309 78.32,121.309 79.139,122.128 ; 77.091,114.408 79.139,116.456 79.139,117.904 ; 78.632,51.371 78.632,52.551 v3(78.652,52.571) ; 78.634,121.623 79.704,121.623 81.679,119.648 81.679,117.904 ; v3@79.056,55.835 79.056,56.761 ; 79.835,126.6 80.666,127.431 ; 80.409,117.904 80.409,116.076 ; 80.409,123.104 80.409,125.965 ; v1@80.77,174.543 v1(80.792,174.521) ; 80.79,114.253 80.79,115.695 80.409,116.076 ; 81.679,118.273 84.854,121.448 89.056,121.448 ; v1(83.098,175.856) v1@83.184,175.942 ; 83.982,116.076 80.409,116.076 ; 85.774,122.368 85.774,126.6 ; v1(87.698,142.956) 89.532,142.956 89.547,142.971 ; v1(87.698,145.511) 89.547,145.511 ; 90.104,116.126 95.796,121.818 100.307,121.818 v1(100.669,122.18) ; v3(91.432,54.631) 91.432,52.881 91.482,52.831 ; 98.657,149.541 99.613,149.541 100.698,148.456 100.698,145.505 106.945,139.258 106.945,139.249 ; 98.657,150.541 99.983,150.541 100.269,150.256 v1(101.798,150.256) ; 116.724,169.415 116.724,168.53 v1(117.598,167.656) ; 126.352,78.828 126.955,78.225 128.852,78.225 ; 126.352,83.828 125.202,83.828 ; 126.352,85.225 126.352,88.828 ; 126.352,93.828 126.352,92.714 125.202,91.564 125.202,83.828 ; 126.352,95.225 126.352,98.828 ; 126.352,160.828 126.352,164.431 ; 126.352,165.828 125.202,166.978 125.202,175.828 ; 126.352,170.828 126.352,174.431 ; 126.352,175.828 125.202,175.828 ; 126.352,180.828 126.955,181.431 128.852,181.431 ; v1(129.352,161.328) 130.852,162.828 130.852,181.328 ; v10(130.852,100.578) 130.852,94.328 134.602,90.578 ; v1(130.852,134.328) 130.852,132.203 140.352,122.703 140.352,120.328 ; v1(132.852,136.828) 134.352,135.328 134.352,132.225 136.352,132.225 ; 133.402,95.148 133.402,94.353 134.152,93.603 v1(135.277,93.603) v1@135.282,93.598 ; v10(133.752,102.728) 133.827,102.728 137.352,106.253 137.352,106.828 134.352,106.828 ; 134.352,124.608 138.632,120.328 138.955,120.328 138.955,119.635 140.352,118.238 ; v1(134.352,156.828) 136.717,159.193 136.717,162.228 ; 135.434,96.088 140.102,96.088 ; v1@135.447,159.328 135.447,162.228 ; 136.352,174.828 135.447,173.923 135.447,167.428 135.447,165.733 143.062,165.733 143.967,164.828 143.967,151.943 v1(143.852,151.828) ; 137.352,108.225 137.245,108.118 133.834,108.118 133.102,108.85 133.102,117.506 133.834,118.238 140.352,118.238 ; 138.352,132.225 v1(138.352,134.328) ; 139.257,162.228 139.257,158.828 139.352,158.828 ; 139.257,167.428 141.452,167.428 143.852,169.828 143.852,173.328 142.352,174.828 135.852,181.328 130.852,181.328 ; v1(139.852,101.528) 139.852,100.081 139.88,100.053 ; 140.749,92.203 141.427,92.203 142.702,93.478 ; 141.274,97.228 141.274,98.353 ; v1(143.352,117.828) 142.942,118.238 140.352,118.238 ; 144.955,92.228 143.952,92.228 142.702,93.478 ; 145.352,97.828 144.427,98.753 142.777,98.753 134.602,90.578 ; v1(145.352,117.828) 148.852,121.328 147.852,122.328 147.852,125.328 148.352,125.828 151.852,125.828 152.487,126.463 155.252,126.463 ; v1(145.852,162.328) 148.352,164.828 148.737,164.828 148.352,165.213 148.352,169.828 ; 146.749,97.828 146.749,96.45 144.952,94.653 v1(142.702,94.653) 142.702,93.478 ; v1(151.852,115.828) 151.852,124.431 152.955,124.431 153.717,125.193 155.252,125.193 ; 151.932,76.868 151.932,78.908 157.852,84.828 ; v1(157.002,92.828) 159.452,92.828 ; v1(157.102,110.578) 160.672,110.578 163.352,107.898 163.352,107.828 163.352,101.828 163.352,95.828 ; 161.352,92.828 161.352,95.225 161.955,95.828 ; 161.352,98.828 161.352,101.225 161.955,101.828 ; 161.352,104.828 161.352,107.225 161.955,107.828 ; 125.202,83.828 125.202,77.978 126.352,76.828 128.852,76.828 129.852,76.828 134.602,81.578 134.602,90.578 ; 125.202,175.828 125.202,181.678 126.352,182.828 128.852,182.828 129.352,182.828 130.852,181.328
  Top Layer w0.6: 98.195,165.169 v5@115.476,165.169 ; 100.908,180.082 100.898,180.072 100.898,178.956 102.598,177.256 112.13,177.256 112.914,176.472 112.914,174.615 ; 112.873,169.456 112.914,169.415 ; 137.987,158.86 137.987,162.228
  Top Layer w0.65: 52.462,159.9 52.462,161.541 ; 53.732,158.68 53.732,161.541
  Top Layer w0.7: 45.533,141.066 45.533,146.791 47.698,148.956 49.298,148.956 50.698,150.356 50.698,152.356 51.523,153.181 53.711,153.181 ; 48.183,161.541 51.192,161.541 51.192,163.65 58.592,163.65 58.592,161.475 58.531,161.414 ; 52.208,158.553 52.208,159.646 52.462,159.9 ; 65.451,112.257 65.451,115.174 ; 65.451,117.768 65.451,115.174 ; v1(66.179,115.174) 65.451,115.174
  Top Layer w0.8: 40.453,141.066 42.993,141.066 45.533,141.066 ; 47.922,180.143 47.922,180.778 47.922,180.856 ; 47.922,185.074 47.922,180.856 ; 52.208,156.648 52.208,158.553 ; v3@52.702,50.481 v3@54.652,48.531 ; 53.711,153.181 55.937,153.181 56.064,153.054 57.496,153.054 v3(57.698,153.256) ; 53.732,158.68 53.605,158.553 53.605,156.648 ; 55.002,166.741 57.704,166.741 58.531,165.914 60.59,167.973 60.59,171.126 ; 55.637,157.029 53.986,157.029 53.605,156.648 ; 57.415,178.873 54.24,178.873 ; 57.698,166.747 v3(57.698,168.456) ; v1(61.198,173.156) 61.198,171.734 60.59,171.126 ; v1(65.398,171.456) 65.398,172.844 67.049,172.844 67.176,172.717 ; 89.547,153.131 91.273,153.131 92.183,154.041 v1(96.155,154.041) 97.013,154.041 98.657,152.397 98.657,151.541 ; 98.055,163.76 98.182,163.76 ; 98.182,163.656 98.182,163.76 ; v1(99.698,163.756) 99.694,163.76 98.182,163.76 ; 100.908,180.082 98.927,180.082 96.736,177.891 ; 47.922,180.856 49.905,178.873 54.24,178.873 ; 53.605,156.648 53.605,155.363 49.491,155.363 45.898,158.956 45.898,167.356 47.298,168.756 48.871,168.756 54.621,174.506 54.621,175.698 54.24,176.079 54.24,178.873 ; 60.59,171.126 60.46,171.256 59.398,171.256 57.098,173.556 57.098,176.17 58.726,177.798 63.382,177.798 69.34,183.756 79.385,183.756 79.591,183.55 79.591,185.328 79.591,186.349 91.595,186.349 91.959,185.985 93.359,184.585 93.359,179.632 94.753,178.238 95.1,177.891 96.736,177.891 ; 96.736,177.891 98.69,175.937 98.69,175.241 98.182,174.733 98.182,172.523 98.182,163.76
  Top Layer w1: 37.192,64.127 41.939,64.127 ; 38.848,95.659 38.851,95.656 38.166,95.656 36.082,97.74 36.082,114.289 37.327,115.534 ; 38.848,115.534 37.327,115.534 ; 41.199,125.915 38.065,125.915 35.974,123.824 35.974,116.887 37.327,115.534 ; 48.003,125.915 47.569,125.915 ; 48.309,64.127 v11@51.719,64.127 ; 49.178,125.915 47.569,125.915 ; 50.956,120.327 55.027,120.327 ; 55.189,120.165 55.027,120.327 ; 56.133,115.383 56.133,115.641 ; 76.726,114.408 74.68,112.362 ; 82.42,65.803 85.358,65.803 86.018,65.143 ; 83.42,63.711 v11(84.612,63.711) ; v1(89.357,107.596) 85.073,111.88 75.162,111.88 74.68,112.362 ; v1(91.967,105.03) 95.498,105.03 95.555,105.087 ; 93.638,65.143 96.092,65.143 ; v8(96.705,107.666) 95.555,106.516 95.555,105.087 ; v8(97.567,95.431) 97.567,95.422 95.555,93.41 95.555,92.895 95.555,98.991 95.555,99.499 ; v8(97.625,101.569) 95.555,99.499 ; 101.925,92.895 107.164,92.895 109.74,90.319 ; 101.925,99.499 107.672,99.499 109.74,97.431 ; 101.925,106.55 107.733,106.55 109.74,104.543 ; 134.352,130.828 136.352,130.828 138.352,130.828 142.167,130.828 143.167,129.828 ; 137.987,158.86 137.955,158.828 137.955,154.725 ; v1(138.352,154.328) 137.955,154.725 ; 142.852,121.328 142.852,124.328 143.852,125.328 143.852,129.143 143.167,129.828 ; 149.537,129.828 149.537,133.013 v1(150.852,134.328) ; 47.569,125.915 49.439,125.915 55.027,120.327 ; 55.027,120.327 56.133,119.221 56.133,115.641 ; 56.133,115.641 61.099,110.675 64.704,110.675 66.9,110.675 69.291,113.066 72.395,113.066 73.099,112.362 74.68,112.362 ; 95.555,99.499 95.555,105.087 ; 137.955,154.725 135.724,154.725 128.952,147.953 128.952,142.353 131.477,139.828 137.077,139.828 143.352,133.553 143.352,130.013 143.167,129.828
  Top Layer w1.1: 48.017,161.375 48.183,161.541
  Top Layer w1.2: 39.814,155.09 36.898,158.006 36.898,173.756 ; 39.814,174.715 37.857,174.715 36.898,173.756 ; 41.403,185.223 39.025,185.223 36.898,183.096 36.898,173.756
  Bottom Layer w0.2: 111.198,167.756 111.898,167.056 112.801,167.056 ; 111.198,169.456 111.998,170.256 112.801,170.256 ; v1(133.352,85.578) 144.602,85.578 148.352,89.328 v1(148.352,94.328) ; v1(134.177,127.253) 135.852,125.578 135.852,119.578 138.852,116.578 138.852,113.328 139.802,112.378 141.552,112.378 142.102,111.828 142.102,109.578 144.102,107.578 v1(152.352,107.578) ; v1(136.352,112.328) 136.352,103.828 136.852,103.328 139.352,103.328 140.352,104.328 149.852,104.328 150.352,103.828 150.352,102.328 151.352,101.328 151.352,89.406 143.052,81.106 143.052,75.588 144.312,74.328 ; v1(137.852,104.828) 138.352,105.328 151.352,105.328 152.852,103.828 152.852,89.209 146.852,83.209 146.852,76.868 ; v1(137.852,116.328) 137.852,112.328 136.852,111.328 136.852,104.328 137.352,103.828 138.852,103.828 139.852,104.828 150.352,104.828 150.852,104.328 150.852,102.828 151.852,101.828 151.852,89.341 144.312,81.801 144.312,76.868 ; v1(138.352,111.328) 138.352,109.828 137.352,108.828 137.352,106.328 137.852,105.828 151.852,105.828 153.352,104.328 153.352,89.144 148.152,83.944 148.152,75.568 149.392,74.328 ; v1(138.665,108.141) 138.665,107.015 138.852,106.828 152.852,106.828 154.352,105.328 154.352,89.003 150.677,85.328 150.677,75.583 151.932,74.328 ; 139.232,74.328 137.977,75.583 137.977,78.294 149.352,89.669 149.352,96.828 v1(148.852,97.328) ; 139.232,76.868 139.232,78.983 149.852,89.603 149.852,97.828 148.852,98.828 148.852,100.828 146.352,103.328 v1(141.352,103.328) ; v1(139.852,111.328) 139.852,110.318 137.965,108.431 137.965,106.715 138.352,106.328 152.352,106.328 153.852,104.828 153.852,89.078 149.392,84.618 149.392,76.868 ; 140.437,88.828 141.977,88.828 143.477,90.328 143.477,97.519 145.352,99.394 v1(145.352,100.828) ; 141.772,74.328 140.552,75.548 140.552,79.738 150.352,89.538 150.352,98.828 v1(149.852,99.328) ; 141.772,76.868 141.772,80.392 150.852,89.472 150.852,100.328 v1(150.352,100.828) ; 145.317,88.828 143.877,90.268 143.877,97.353 v1(146.352,99.828) ; 146.852,74.328 145.602,75.578 145.602,82.525 152.352,89.275 152.352,102.828 v1(151.852,103.328) ; v1(152.102,111.828) 157.102,106.828 v1(157.102,104.828) ; v1(152.102,113.078) 158.352,106.828 158.352,101.828 157.102,100.578 v1(157.102,98.828)
  Bottom Layer w0.25: v1(74.198,163.956) 74.587,163.956 81.098,163.956 v1(83.098,165.956) ; v1@74.498,166.581 76.148,166.581 78.198,168.631 v1(78.198,170.156) ; v1(75.848,167.306) 76.498,167.956 v1(76.498,171.456) ; v1(81.798,167.756) 85.298,167.756 86.298,166.756 v1(86.298,162.456) ; v1(84.598,166.056) 84.598,163.951 v1(84.798,163.751)
  Bottom Layer w0.254: v2@40.854,51.511 v2(40.798,51.567) 52.048,51.567 53.152,52.671 v2(53.192,52.631) ; v2(41.312,52.131) 46.972,52.131 47.004,52.163 49.444,52.163 49.692,52.411 ; 42.087,43.622 41.472,44.237 41.472,45.791 42.976,45.791 42.979,45.794 43.042,45.731 44.701,45.731 45,46.03 ; v2(42.937,55.606) 42.937,55.512 v2(44.115,54.334) ; 43.339,46.831 46.834,46.831 ; 46.94,52.163 46.94,53.134 ; 47.167,43.622 54.556,51.011 57.412,51.011 59.532,53.131 v2(60.652,53.131) ; v3(48.532,54.511) 48.532,56.171 53.812,61.451 55.762,61.451 ; 49.172,43.431 49.172,44.851 54.859,50.538 57.719,50.538 v2(59.592,52.411) ; 51.089,52.411 51.712,52.411 v2(53.172,53.871) 54.451,52.592 58.313,52.592 59.438,53.717 66.278,53.717 v4(68.652,56.091) ; v2(53.852,59.491) 53.892,59.531 63.552,59.531 67.112,55.971 v2(67.112,55.571) ; v2(54.552,53.331) 54.932,53.331 55.217,53.046 58.107,53.046 59.232,54.171 60.76,54.171 61.312,54.723 v2(61.312,54.751) ; 55.232,57.371 55.792,56.811 58.089,56.811 v2(58.609,56.291) ; 57.172,53.623 57.172,54.571 ; v2(57.712,50.011) 59.192,50.011 61.732,52.551 62.63,52.551 v2(63.535,51.646) ; v2(57.832,57.831) 58.292,57.371 63.412,57.371 64.109,56.674 v2(64.109,56.431) ; v2(58.572,61.011) 59.512,61.011 ; 58.916,44.415 58.916,45.939 ; v4(60.452,48.931) v4@60.492,48.891 ; v1(61.168,97.007) 61.168,123.854 63.341,126.027 81.616,126.027 82.681,124.962 82.681,124.187 v1(82.749,124.119) ; 63.936,44.515 63.936,45.966 ; v2(63.972,60.811) 63.972,61.751 ; v2(63.992,52.291) 65.312,50.971 65.752,50.971 v2(65.792,51.011) ; 64.196,77.147 64.196,79.306 ; v1(64.842,82.923) 64.842,87.993 68.513,91.664 v1(71.229,91.664) ; v1(65.625,93.162) 65.866,93.403 67.244,93.403 ; v2(65.792,47.411) 65.792,45.631 68.15,43.273 ; v1(66.052,106.318) 66.515,106.318 67.619,105.214 69.276,105.214 ; 66.432,64.127 66.452,64.147 ; 66.736,77.147 66.736,79.306 ; 67.135,58.911 67.295,58.751 ; 67.292,59.991 67.312,60.011 ; v1(67.497,95.104) 68.097,94.504 69.497,94.504 78.954,103.961 83.876,103.961 98.733,118.818 101.392,118.818 ; 67.738,45.432 69.498,45.432 ; 68.184,87.307 68.87,87.307 v1(69.423,86.754) ; 69.276,77.147 69.276,79.179 ; 69.276,80.576 69.522,80.822 71.816,80.822 ; v1(69.431,95.466) 69.634,95.466 78.709,104.541 83.529,104.541 95.521,116.533 95.521,119.726 v1(96.624,120.829) ; v13(69.444,84.29) 70.976,84.29 73.528,81.738 74.887,81.738 75.678,80.947 75.678,78.365 76.896,77.147 76.896,79.179 ; 69.554,43.362 69.554,45.376 ; v4@69.652,60.011 v4(69.752,60.111) ; v4(69.712,55.491) 69.795,55.574 70.752,55.574 ; 70.292,89.339 70.292,89.66 v12(71.021,90.389) ; 71.384,87.307 71.384,86.52 v1(71.662,86.242) ; 71.816,77.147 71.816,79.306 ; 71.816,80.703 73.048,79.471 73.048,76.337 73.416,75.969 85.878,75.969 87.056,77.147 ; 71.892,61.811 72.052,61.971 v4(72.052,62.731) ; 72.052,56.531 72.052,57.091 v4(72.552,57.591) ; v1(72.106,115.052) 72.106,114.422 72.314,114.214 73.983,114.214 79.513,119.744 v1(79.981,119.744) ; v4@72.272,60.011 v4(72.272,60.091) ; 74.021,82.853 75.545,82.853 ; 74.021,84.553 75.369,84.553 75.545,84.377 ; 74.356,77.147 74.356,79.179 ; v4(77.252,66.291) 77.752,65.791 78.415,65.791 ; v1@78.073,98.587 v1(78.018,98.532) 78.018,99.751 78.073,99.806 ; 79.436,77.147 79.436,79.306 ; 79.436,80.703 81.976,80.703 84.516,80.703 85.645,80.703 87.056,79.292 87.056,77.147 ; 81.976,77.147 81.976,79.306 ; 84.516,77.147 84.516,79.306 ; 84.985,88.074 87.017,88.074 ; 85.185,83.194 87.017,83.194 ; 87.056,74.607 87.056,77.147 ; v1(90.264,93.55) 90.264,93.425 93.334,90.355 97.724,90.355 ; v1(90.414,96.818) 97.202,96.818 97.851,97.467 ; v1(90.565,102.027) 92.609,104.071 97.724,104.071 ; v1(96.165,85.299) 88.013,77.147 87.056,77.147 ; 97.71,96.818 97.851,96.959 ; 99.121,90.355 100.721,90.355 101.28,90.914 ; 99.172,104.122 101.28,104.122 ; 99.248,96.959 99.299,97.01 ; 99.248,97.467 100.823,97.467 101.28,97.01 ; v1(100.888,77.133) v1@100.888,77.142 ; v1(102.461,122.359) 103.439,122.359 ; 102.804,118.803 103.947,118.803 104.836,117.914 105.268,117.914 106.868,116.314 ; 103.312,97.975 103.466,97.821 ; 104.292,92.859 106.064,92.859 ; 104.836,119.311 105.776,119.311 106.868,118.219 ; 105.344,124.391 104.836,123.883 104.836,122.359 106.868,122.359 106.995,122.486 ; 105.778,97.821 106.064,98.107 ; 106.064,90.995 106.73,90.329 ; 106.196,105.087 106.73,104.553 ; 106.741,124.391 108.392,124.391 ; 107.833,120.327 108.244,120.327 ; 108.392,79.56 108.392,77.655 110.932,75.115 ; 108.392,80.957 108.392,81.986 109.141,82.735 110.932,82.735 ; 108.392,117.279 108.54,117.279 ; 108.392,122.74 108.773,122.359 ; 109.74,92.735 109.864,92.859 ; 109.74,99.847 109.864,99.971 ; 109.74,106.959 109.864,107.083
  Bottom Layer w0.3: 46.812,46.811 v2(47.912,46.811) 49.352,46.811 v2@50.092,47.551 ; v3(54.104,103.904) 54.104,102.711 64.726,92.089 v1(67.271,92.089) ; v4(55.812,55.011) 56.112,55.011 57.069,55.968 57.172,55.968 ; 60.035,48.171 60.035,48.514 v4(60.452,48.931) ; 61.432,48.171 62.192,48.171 v4(62.352,48.331) ; v1(65.398,175.656) 65.898,176.156 69.149,176.156 69.177,176.184 ; v4(65.632,58.911) 67.135,58.911 ; v4(65.632,59.991) 67.292,59.991 ; 66.452,64.147 v4(66.452,65.391) ; v3@67.465,170.689 v3(67.465,170.723) 69.05,170.723 69.177,170.85 ; 68.692,57.411 68.692,58.751 69.752,58.751 71.012,58.751 v4@72.272,60.011 ; 68.709,60.011 v4@69.652,60.011 ; v1(69.423,86.754) 69.784,86.393 69.784,85.783 ; 70.447,170.723 70.864,171.14 74.13,171.14 75.298,172.308 v1(75.298,173.256) ; 70.574,176.184 73.966,176.184 74.13,176.02 ; 70.752,56.971 70.752,57.071 73.512,59.831 73.512,64.127 ; v9(71.598,163.056) 73.798,165.256 80.698,165.256 v1(81.898,166.456) v1@81.998,166.556 ; v1(76.698,175.356) 79.698,172.356 v3(90.398,172.356) ; v1(87.672,150.456) 87.998,150.782 v1(87.998,156.756) ; v6(87.998,173.956) v1(87.998,187.456) ; v1(96.165,85.299) 99.248,82.216 99.248,81.211 ; v1@96.637,161.156 95.737,162.056 95.737,165.995 v1(96.598,166.856) 103.798,166.856 114.192,177.25 116.204,177.25 v1(116.898,176.556) ; v1@103.598,161.156 113.498,151.256 113.998,151.256 ; v3(113.698,153.856) 105.358,162.196 105.358,167.616 114.242,176.5 v1(115.454,176.5)
  Bottom Layer w0.4: v1(53.654,94.034) 54.286,94.034 54.544,94.292 ; 53.712,57.511 55.092,57.511 55.232,57.371 ; v3(54.739,54.511) 55.112,54.884 55.112,55.854 55.232,55.974 ; v1@67.979,106.983 68.904,106.983 69.276,106.611 ; v3(71.252,43.871) 71.252,43.931 71.586,44.265 71.586,46.341 ; v3(91.572,56.091) 93.072,54.591 93.072,53.971 ; 94.037,51.939 94.929,52.831 v3(95.172,52.831) v3@95.099,52.904
  Bottom Layer w0.5: 39.814,153.334 39.814,153.49 ; 39.814,172.959 39.814,173.115 ; v3(48.532,54.511) 52.893,54.511 ; 52.903,54.521 53.441,54.521 ; 53.451,54.511 54.852,54.511 v3(54.739,54.511) ; v3@54.852,54.511 55.74,53.623 57.172,53.623 57.724,53.623 v3@58.962,54.861 ; v3(62.109,51.691) 62.57,51.691 63.94,50.321 70.762,50.321 71.437,50.996 ; v1(65.625,93.162) v1(65.625,98.52) ; 69.276,97.391 68.692,97.975 67.244,97.975 66.381,97.975 64.967,99.389 64.967,106.767 65.603,107.403 66.965,107.403 67.385,106.983 v1(67.929,106.983) 67.979,106.983 69.896,108.9 ; v1(69.896,120.64) 69.896,108.9 ; 72.455,50.471 71.961,50.471 71.437,50.996 ; v3(73.952,53.131) 73.572,53.131 71.437,50.996 ; v1(75.545,102.737) 75.545,103.251 69.896,108.9 ; 75.704,98.988 76.522,99.806 78.073,99.806 ; 78.652,50.817 v3(78.652,52.571) 89.372,52.571 v3(91.432,54.631) ; v3@91.432,54.599 v3(91.432,54.631) ; 92.132,51.939 91.432,52.639 v3(91.432,54.631) ; 103.312,91.879 104.292,92.859 ; 103.312,105.087 106.196,105.087 ; 103.466,97.821 105.778,97.821 ; 106.064,90.995 106.064,92.859 ; 106.064,98.107 106.064,99.971 ; 106.064,105.219 106.064,107.083 ; 106.868,118.219 106.868,119.724 106.117,120.475 102.374,120.475 v1(100.669,122.18) 104.017,125.528 107.914,125.528 108.392,125.05 108.392,124.391 108.392,122.74 ; 108.244,120.327 110.276,118.295 110.932,118.295 ; 108.9,117.279 109.378,116.801 112.207,116.801 113.116,117.711 ; 109.74,90.319 109.74,92.735 ; 109.74,97.431 109.74,99.847 ; 109.74,104.543 109.74,106.959 ; v1(129.352,161.328) 128.352,160.328 128.352,136.828 v1(130.852,134.328) ; v1(132.852,136.828) 129.352,140.328 129.352,151.828 v1(134.352,156.828) ; v10(133.752,102.728) 133.752,101.653 132.677,100.578 v10(130.852,100.578) 130.852,103.328 ; 134.352,106.828 130.852,103.328 ; 134.352,124.608 131.977,126.983 131.977,129.378 133.202,130.603 134.327,130.603 145.352,119.578 v1(145.352,117.828) ; v1(135.352,159.328) 142.852,159.328 v1(145.852,162.328) ; 138.336,144.144 138.221,144.144 137.171,143.094 136.086,143.094 ; v1(138.352,134.328) 136.086,136.594 136.086,143.094 ; v1(143.352,117.828) 144.852,117.828 155.852,106.828 155.852,91.828 ; 154.472,76.868 155.852,78.248 155.852,91.828 ; v1(157.102,110.578) v1(151.852,115.828) 133.352,134.328 v1(130.852,134.328) ; 157.352,156.328 159.352,156.328 161.352,154.328 161.352,151.828 v1(143.852,151.828) 137.852,151.828 135.686,149.662 135.686,143.494 136.086,143.094 ; 160.352,87.328 155.852,91.828 ; 130.852,103.328 v1(130.852,134.328)
  Bottom Layer w0.6: 41.998,154.506 44.398,156.906 44.398,171.731 41.998,174.131 ; 139.352,146.328 142.277,149.253 153.927,149.253 156.852,146.328 ; 154.472,74.328 155.852,74.328 161.852,80.328 ; 157.352,158.828 163.852,158.828 ; 160.352,82.328 160.352,81.828 161.852,80.328 ; 162.622,164.328 163.852,163.098 163.852,158.828 ; 161.852,80.328 163.852,82.328 163.852,136.828 158.907,141.773 158.907,148.109 163.852,153.054 163.852,158.828
  Bottom Layer w0.7: 65.72,116.263 66.179,115.804 v1(66.179,115.174)
  Bottom Layer w0.8: v3(57.698,153.256) v3(57.698,168.456) ; v1@61.335,173.219 63.098,171.456 v1(65.398,171.456) ; v1(99.698,163.756) 99.698,157.584 v1(96.155,154.041) 96.155,144.959 101.865,139.249
  Bottom Layer w1: 41.032,95.075 43.449,97.492 43.449,112.533 41.032,114.95 ; v11@51.719,64.127 66.432,64.127 73.512,64.127 84.196,64.127 v11(84.612,63.711) ; v1(89.357,107.596) 91.923,105.03 v1(91.967,105.03) ; v8(96.705,107.666) 97.682,108.643 98.74,108.643 ; v8(97.567,95.431) 98.236,95.431 99.248,94.419 ; v8(97.625,101.569) 97.686,101.569 99.248,100.007 ; v1(138.352,154.328) 138.852,153.828 153.082,153.828 ; 139.936,144.144 149.752,134.328 v1(150.852,134.328) 157.436,140.912 157.436,144.144 ; 153.082,164.328 153.082,153.828 ; 157.352,153.828 153.082,153.828
  other v1: 149.877,120.203 149.877,121.303 149.877,122.428 47.998,164.056 55.698,170.156 55.698,171.156 55.698,172.056 59.498,174.656 59.498,175.556 59.498,176.456 80.998,184.056
  other v3: 54.672,48.531 52.712,50.491 113.598,151.156 84.498,180.656
  other v5: 115.476,159.415 115.476,162.165 115.476,164.915
  other v6: 54.292,51.711
  other v7: 62.924,134.626 89.724,134.626 62.924,161.426 89.724,161.426
  other v11: 51.722,64.124

## Polygon pours and split planes (outlines as drawn)
no net on Bottom Layer "GNDPLANE" (solid, pour order 1000): 35.952,188.042 52.97,188.042 53.021,187.992 53.122,187.89 53.122,183.42 53.122,183.394 54.951,181.565 55.281,181.235 57.847,181.235 57.898,181.235 60.184,183.521 60.234,183.572 60.234,187.941 93.686,187.941 93.94,187.687 93.94,183.724 93.94,183.343 95.998,181.286 96.15,181.134 98.665,181.134 101.052,183.521 101.103,183.572 101.103,187.992 117.969,187.992 118.172,187.788 118.172,131.883 101.001,131.883 101.052,131.934 101.052,136.912 100.519,136.912 98.969,138.462 95.642,138.462 95.642,138.157 93.94,136.455 93.839,136.353 93.839,131.934 60.133,131.934 60.234,132.035 60.234,135.515 60.234,136.455 58.177,138.512 58.126,138.563 55.053,138.563 54.9,138.563 52.157,135.82 52.208,135.769 52.208,131.934 36.054,131.934 35.901,132.086 35.952,132.137 35.952,188.042
no net on Bottom Layer "Mechanical 1-No Net" (solid, remove dead copper, pour order 2): 164.352,72.828 128.852,72.828 128.352,73.328 128.352,186.328 128.852,186.828 164.352,186.828
no net on Bottom Layer "ISOGND-TAB" (solid, pour order 1000): 97.652,42.271 98.332,42.951 98.372,42.951 98.372,52.611 96.792,54.191 96.332,54.651 95.552,54.651 95.392,54.651 93.552,56.491 93.472,56.571 92.692,57.351 92.632,57.411 79.132,57.411 78.332,57.411 77.732,56.811 77.652,56.731 77.652,43.111 77.752,43.111 78.592,42.271
no net on Bottom Layer "GND-TAB" (solid, pour order 1001): 96.252,66.351 50.492,66.351 50.292,66.351 42.272,58.331 41.412,57.471 41.412,55.951 41.412,55.532 40.719,54.839 40.091,54.211 37.552,54.211 37.072,54.211 35.212,52.351 35.202,52.341 35.202,43.431 35.202,43.401 36.272,42.331 69.992,42.331 72.792,42.331 73.772,43.311 73.832,43.371 73.832,57.791 73.832,58.151 76.892,61.211 76.952,61.271 96.212,61.271
no net on Bottom Layer "GND-PLANE" (solid, pour order 1000): 100.144,76.623 102.497,76.623 102.564,76.69 103.707,77.833 103.707,82.405 103.909,82.405 107.203,85.699 108.211,86.707 116.75,86.707 116.75,128.525 116.683,128.592 116.616,128.659 100.547,128.659 100.547,123.818 98.665,121.936 98.598,121.869 93.891,121.869 93.824,121.869 92.278,123.415 92.076,123.617 92.076,128.525 59.738,128.525 59.671,128.592 59.402,128.323 59.402,123.213 59.401,123.213 58.259,122.071 57.991,122.339 53.15,122.339 53.15,122.474 51.738,123.886 51.469,124.155 51.469,128.256 36.073,128.256 35.939,128.39 35.334,127.785 35.334,117.163 35.334,73.53 35.401,73.463 51.066,73.463 51.066,77.43 53.62,79.984 53.687,80.051 57.99,80.051 58.192,80.051 59.469,78.774 59.537,78.706 59.537,73.127 92.749,73.127 92.816,73.194 92.816,77.9 92.816,78.236 94.631,80.051 97.993,80.051 98.06,80.051 100.211,77.9 100.144,77.833 100.144,76.623

## Keep-outs
Mechanical 1:
  lines w0.254: 94.143,185.046 94.143,188.356

## Other copper
Top Layer:
  rectangle: 52.498,179.756 54.398,180.756

## Silkscreen, mask and mechanical layers (free items; w line width, h text height)
Top Overlay:
  drawing of 1662 lines, arcs and shapes, not listed
  text "2011 GPSBarometer" at 60.498,186.356 h1.3
  text "R Makepeace" at 60.398,184.356 h1
  text "K Ng" at 60.398,182.256 h1
  text "3V3" at 111.198,164.456 h1
  text "GND" at 111.298,161.756 h1
  text "EOC" at 111.398,159.056 h1
  text "XCLR" at 110.498,156.256 h1
  text "SCL" at 111.598,153.656 h1
  text "3V3" at 83.598,152.656 h1
  text "SDA" at 111.498,150.756 h1
  text "RX" at 83.598,150.356 h1
  text "TX" at 83.398,147.756 h1
  text "GND" at 83.298,145.356 h1
  text "GND" at 83.298,142.756 h1
  text "NICTA" at 55.415,90.302 h2
  text "David" at 53.907,88.338 h0.8
  text "Favaloro" at 53.862,86.902 h0.8
  text "2011v0.1" at 53.772,85.51 h0.8
  text "BMS Master" at 53.756,84.178 h0.8
  text "ID" at 51.811,81.626 h0.8
  text "5V Out Switched" at 119.761,62.865 h1.5
  text "David Favaloro" at 76.272,59.851 h0.9
  text "5" at 53.172,59.251 h0.6
  text "BMS Slave 2011v0.1" at 75.892,58.291 h0.9
  text "-" at 142.494,58.293 h2.5
  text "ISOLATED UART" at 105.791,57.658 h1
  text "4" at 53.172,57.111 h0.6
  text "Gnd Rx Tx 3V3" at 105.791,55.753 h1
  text "3" at 53.172,55.231 h0.6
  text "2" at 53.172,53.211 h0.6
  text "+" at 142.494,52.451 h2.5
  text "1" at 53.292,51.231 h0.6
  text "BatteryCAN" at 145.796,49.657 h1.5
  text "0" at 53.192,49.191 h0.6
  text "Do not connect to main" at 143.637,47.879 h0.9
  text "ID" at 47.232,46.559 h1
  text "CAN network !!!" at 143.51,46.355 h0.9
Bottom Overlay:
  drawing of 1662 lines, arcs and shapes, not listed
  text "keg" at 60.786,108.206 h2
  text "keg" at 43.528,59.833 h1.13
  text "NICTA" at 47.752,56.411 h1.08